# Altium PCB SLEEPTRACK2_PHASE4.PcbDoc
Units mil, origin at the board's own origin, x right, y up, seen from the top; angles counter-clockwise.
Board outline 1320 x 2000 mil, 4 copper layers (Top Layer, GND, VCC, Bottom Layer), stack 30.634 mil thick; 23 components, 18 nets, 92 pads, 50 vias.
Unrouted connection lines stored in the file: 1.
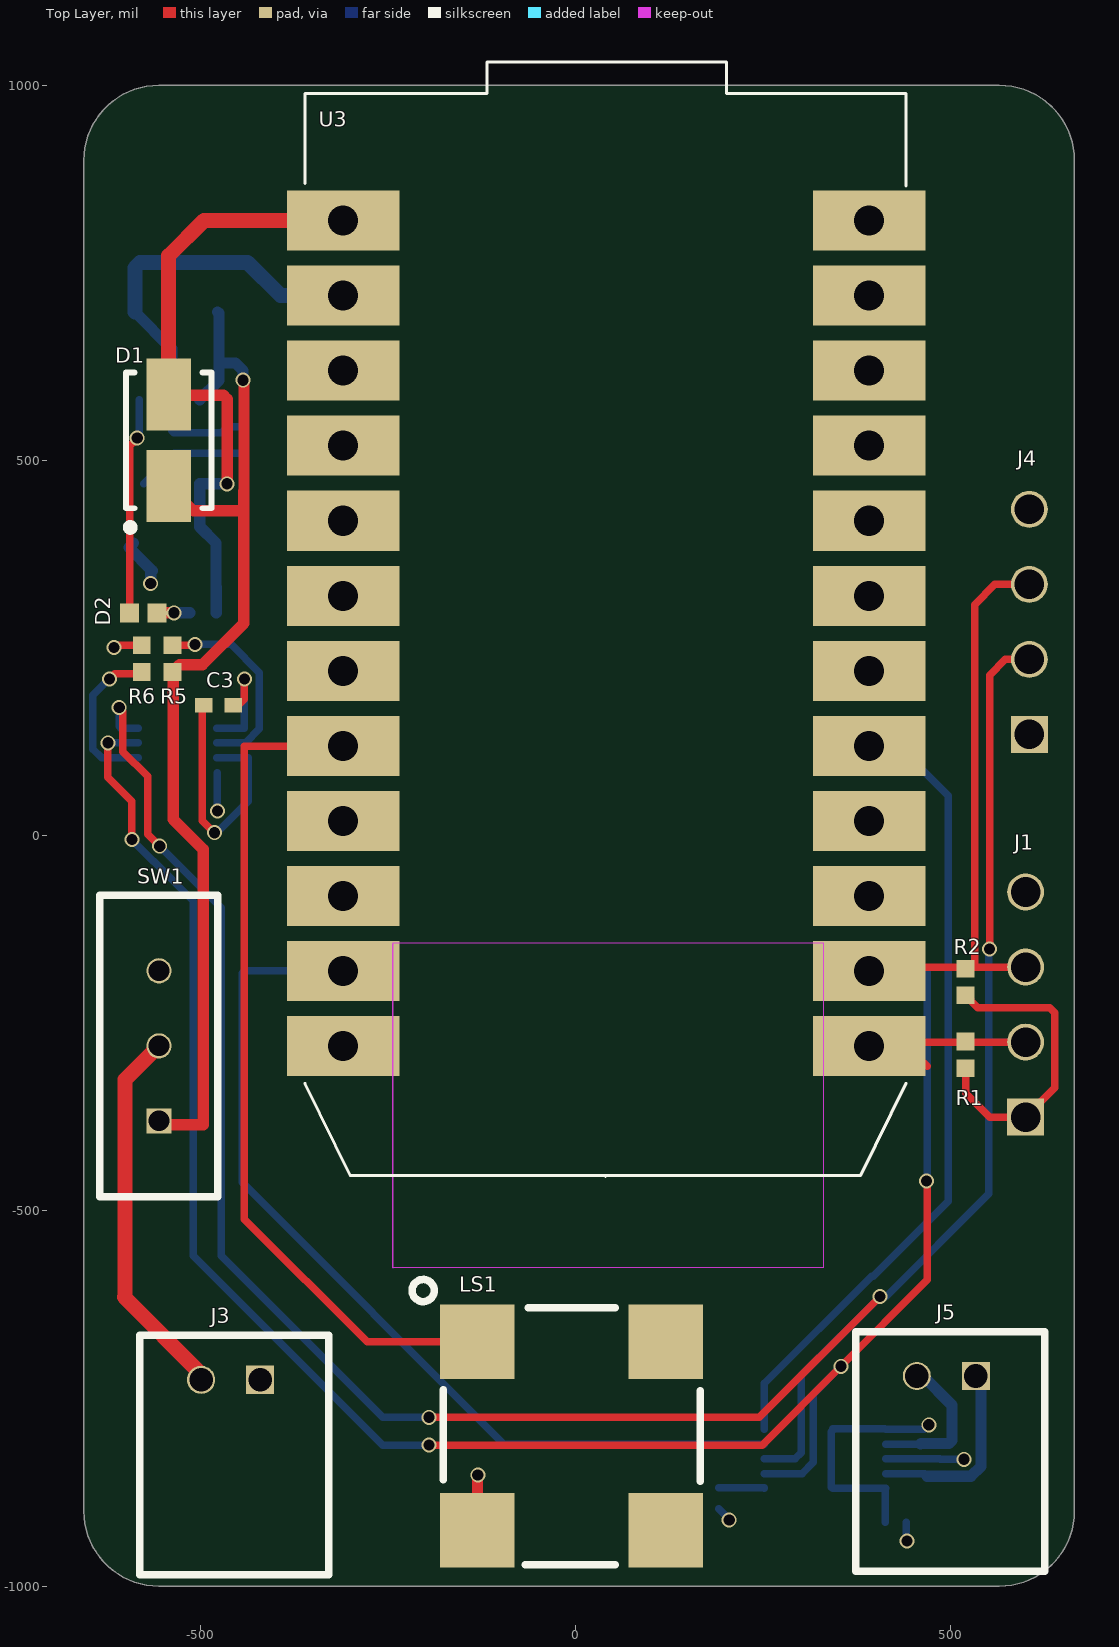
[diagram p0: Top Layer view]
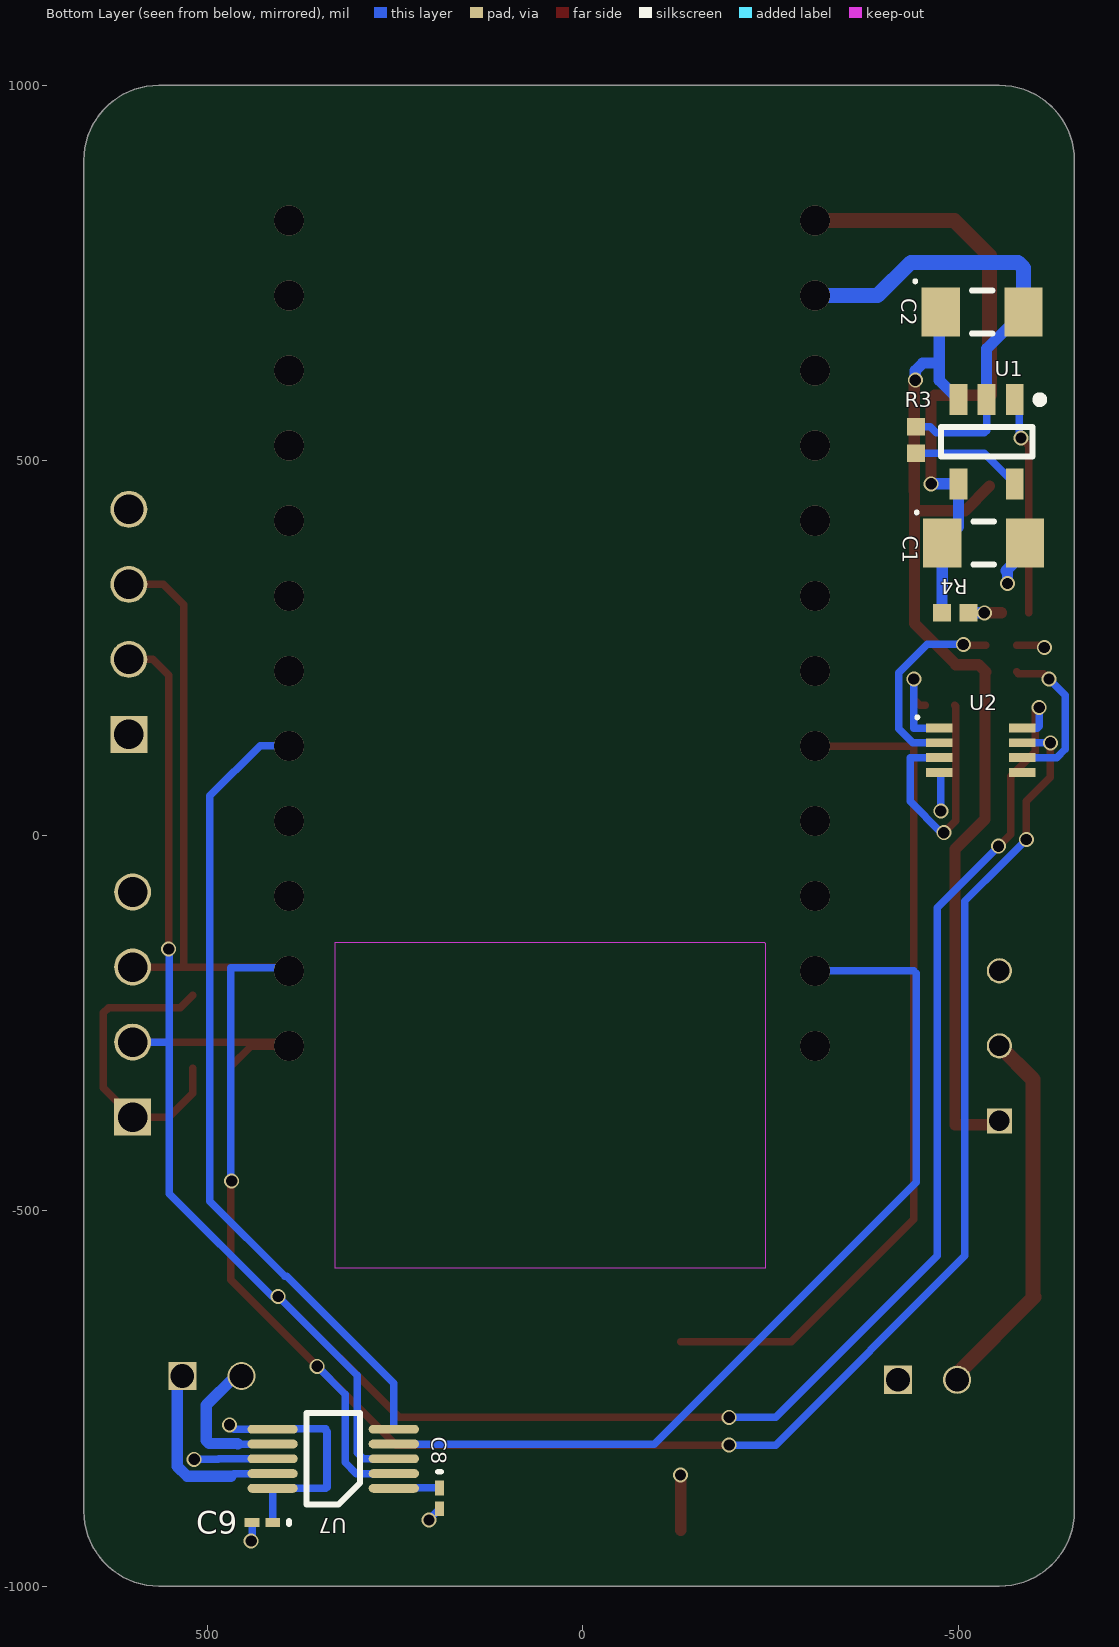
[diagram p1: Bottom Layer view, seen from below]
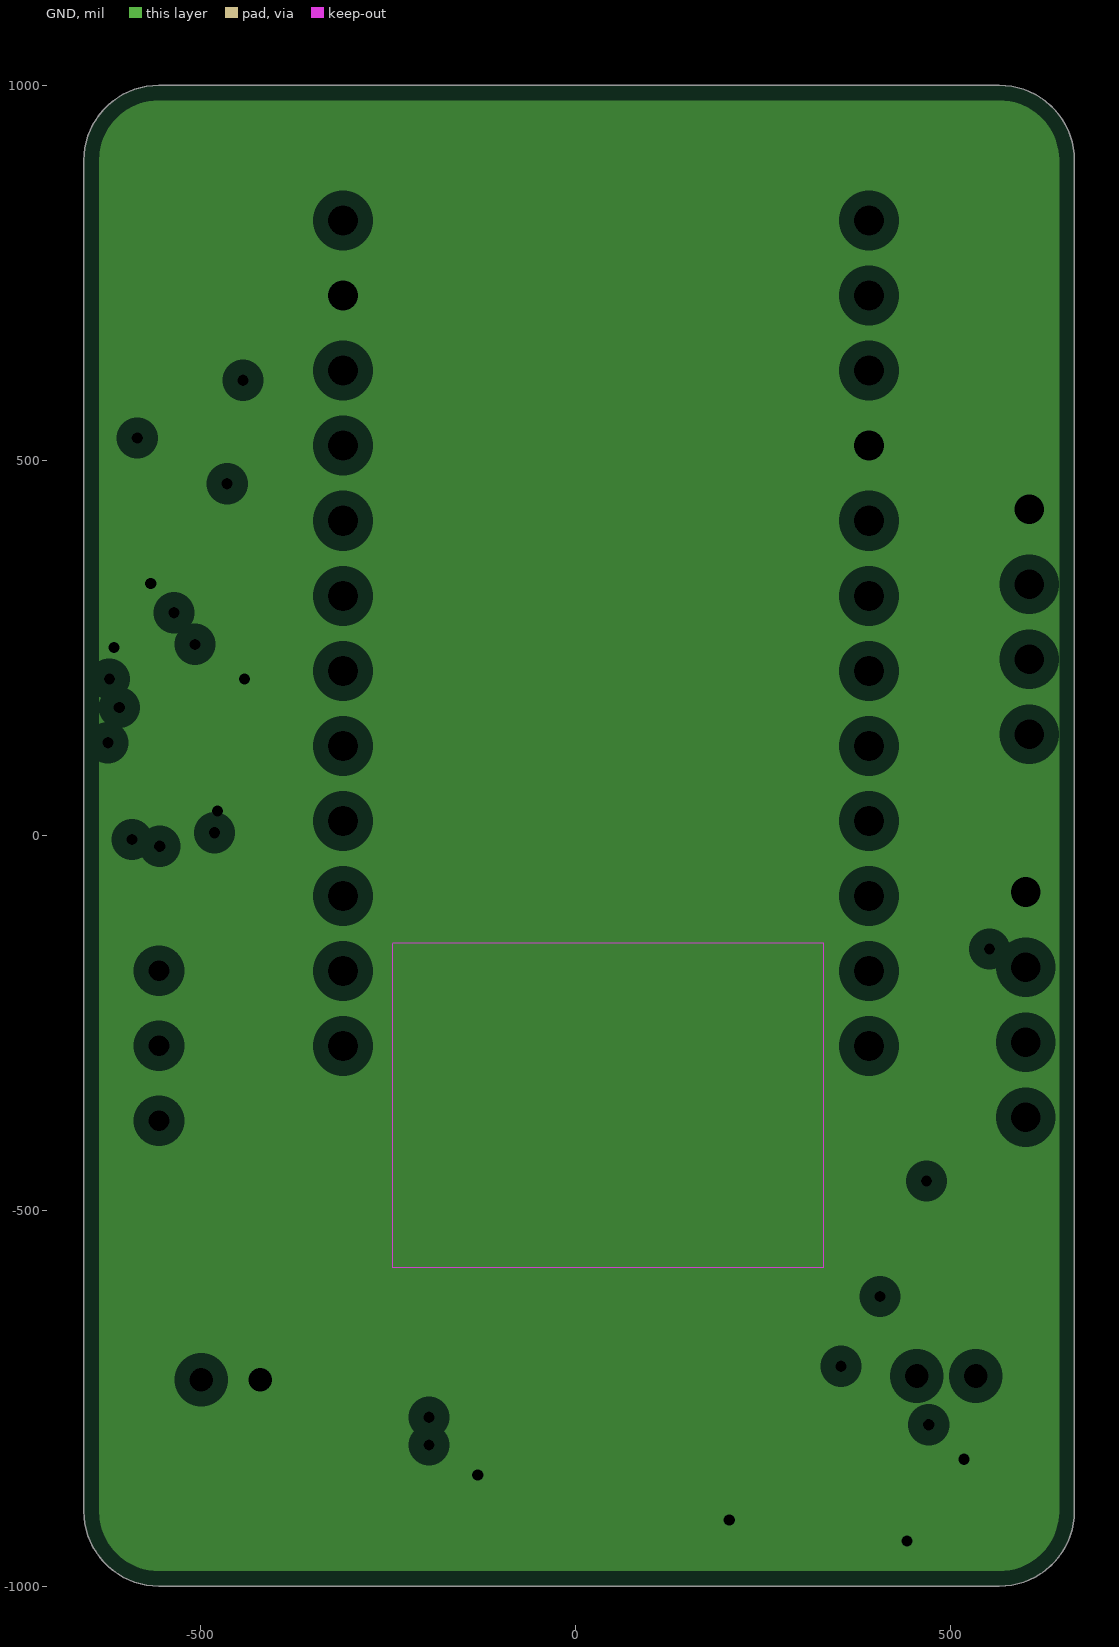
[diagram p2: GND, clearances drawn from the general rule]
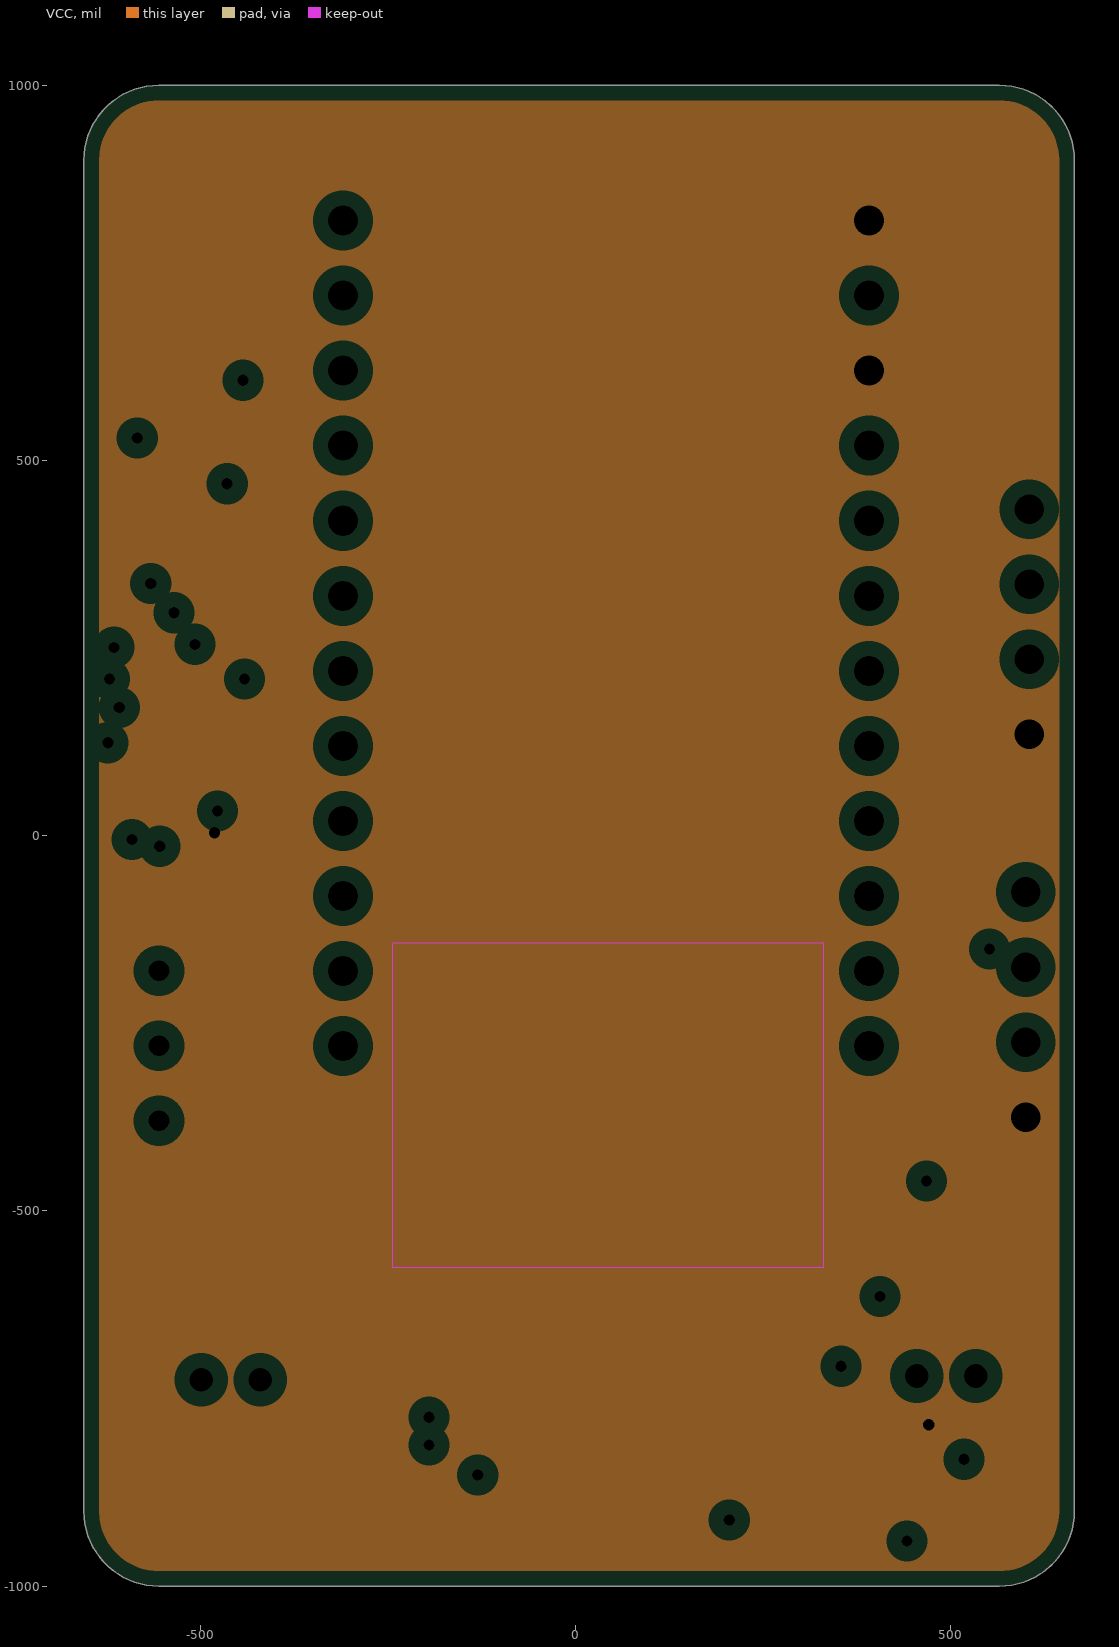
[diagram p3: VCC, clearances drawn from the general rule]

## Layer stack, top to bottom
Top Solder: solder mask 0.4, Solder Resist, Dk 3.5
Top Layer: signal copper 1.4
Dielectric 1: core 10, FR-4, Dk 4.2
GND: plane copper 1.417, net PHOTON_GND
Dielectric 3: prepreg 5, Dk 4.2
VCC: plane copper 1.417, net PHOTON_3V3
Dielectric 2: core 10, Dk 4.2
Bottom Layer: signal copper 1.4
Bottom Solder: solder mask 0.4, Solder Resist, Dk 3.5

## Board outline
-655,-900 -655,900 cw(c-555,900) -555,1000 565,1000 cw(c565,900) 665,900 665,-900 cw(c565,-900) 565,-1000 -555,-1000 cw(c-555,-900)

## Design rules (kind name [scope] priority, off if disabled: settings)
Clearance [All] p1: gap=5
HoleSize [All] p1: absolutevalues=TRUE maxlimit=300 minlimit=1 maxpercent=80.000 minpercent=20.000
MinimumSolderMaskSliver [All] p1: minsoldermaskwidth=3
PlaneClearance [All] p1: clearance=20
PlaneConnect [All] p1: planeconnectstyle=Relief reliefexpansion=20 reliefentries=4 reliefconductorwidth=10 reliefairgap=10
PolygonConnect [All] p1: connectstyle=Relief reliefconductorwidth=10 reliefentries=4 polygonreliefangle="90 Angle" airgapwidth=10
RoomDefinition "P09_DRV2605L Motor Driver" [InComponentClass('P09_DRV2605L Motor Driver')] p1 off: confinementstyle=ConfineIn formatcopy=TRUE lockcomponents=FALSE outline 710,660 1015,660 1015,800 710,800
RoomDefinition "P06_Audio " [InComponentClass('P06_Audio ')] p2 off: confinementstyle=ConfineIn formatcopy=TRUE lockcomponents=FALSE outline 710,100 1115,100 1115,610 710,610
RoomDefinition P04_Connectors [InComponentClass('P04_Connectors')] p3 off: confinementstyle=ConfineIn formatcopy=TRUE lockcomponents=FALSE outline 710,-450 1005,-450 1005,50 710,50
RoomDefinition "P03_Battery Circuit" [InComponentClass('P03_Battery Circuit')] p4 off: confinementstyle=ConfineIn formatcopy=TRUE lockcomponents=FALSE outline 710,-940 2095,-940 2095,-500 710,-500
RoomDefinition P02_Photon [InComponentClass('P02_Photon')] p5 off: confinementstyle=ConfineIn formatcopy=TRUE lockcomponents=FALSE outline -2000,-1660 -1085,-1660 -1085,-1370 -2000,-1370
RoutingVias [All] p1: holewidth=15 width=20 viastyle="Through Hole" minholewidth=10 minwidth=15 maxholewidth=50 maxwidth=50
ShortCircuit [All] p1: allowed=TRUE
SilkToSilkClearance [All] p1: silktosilkclearance=5
SilkToSolderMaskClearance [IsPad] p1: minsilkscreentomaskgap=3 clearancetoexposedcopper=TRUE
SolderMaskExpansion [All] p1: expansion=4
Width [All] p1: maxlimit=50 minlimit=10 preferedwidth=10
23 further rules are at their usual default settings.

## Classes and differential pairs
component class P02_Photon: R1 R2 U3
component class "P03_Battery Circuit": C1 C2 C3 D1 D2 D3 J3 R3 R4 R5 R6 SW1 U1 U2
component class P04_Connectors: J1 J4
component class "P06_Audio ": LS1
component class "P09_DRV2605L Motor Driver": C8 C9 J5 P1 U7

## Components (designator, comment, footprint, x,y, rotation, side; value= is the part's Value field where it differs from the comment)
C1 "4.7µF ±10%" CAPCP1206 -534,390 r180 bottom
C2 "4.7µF ±10%" CAPCP1206 -532,698 r180 bottom
C3 "GRM155R61A105KE15D" 0402 -475.69,174 r0 top
C8 "C1608X7R1C105K" 0603 191,-883 r270 bottom
C9 "C1608X7R1C105K" 0603 427,-915 r0 bottom
D1 "VS-MBRA140TRPBF" D0-214AC -542,527.02 r90 top
D2 "RED LED" LED0402N -575.89,297 r0 top
J1 "HEADER 4/SM" 61900411021 600,-375 r90 top
J3 "S2B-PH-K-S" S2B-PH-K-S -420,-725 r180 top
J4 "HEADER 4/SM" 61900411021 605,135 r90 top
J5 "S2B-PH-K-S" S2B-PH-K-S 533.74,-720 r180 top
LS1 "SDR08540M3-01" SDR08540M3-01 -5,-800 r90 top
R1 "10k" RESC402N 520,-292 r90 top
R2 "10k" RESC402N 520,-195 r90 top
R3 "2k" RESC402N -444,527.28 r90 bottom
R4 "330R" RESC402N -496.28,297 r180 bottom
R5 "1k" RESC402N -537,236 r270 top
R6 "1k" RESC402N -578,236 r90 top
SW1 "100mA, 30V" SS12DH2 -555,-280 r90 top
U1 "MCP73831" SOT95P270X145-5N -538,525 r270 bottom
U2 "MAX17044" SON50P300X100_HS-9M -530,114 r180 bottom
U3 "photon_headerless" "PHOTON P0 - DUPLICATE" 40,306 r0 top
U7 "DRV2650L" DGS0010A_N 332.71,-830.31 r0 bottom

## Footprints (in the part's own frame and the unit in brackets; to place one, negate y for a bottom-side part, rotate by r counter-clockwise, add the part's x,y. Pads: shape width x height; smd on the part's side, far side on the other; paste and mask are expansions set on the pad)
0402 [mm] "Chip Capacitor, Body 1.0x0.5mm, IPC High Density"
  rect 0.6x0.5 smd: 1(-0.5,0) 2(0.5,0)
  body extent -0.55,-0.3 0.55,0.3, height 1.3
0603 [mm] "Chip Inductor, Body 0.6x0.3mm, IPC High Density"
  rect 0.5x0.3 smd: 1(-0.35,0) 2(0.35,0)
  silkscreen extent -0.9,-0.05 -0.9,0.05, body extent -0.33,-0.18 0.33,0.18, height 0.55
61900411021 [mm] "4 Positions Header Connector 0.100\" (2.54mm) Through Hole, Right Angle Tin"
  rect 1.25x1.25 hole 1: 1(0,0)
  round 1.25 hole 1: 2(2.54,0) 3(5.08,0) 4(7.62,0)
  body extent -1.23,-13.12 8.93,0.4, height 5.9
CAPCP1206 [mm] "Chip Capacitor, 2-Leads, Body 3.20x1.50mm, IPC Medium Density"
  rect 1.3x1.65 smd: 1(-1.4,0) 2(1.4,0)
  silkscreen extent -2.31,-0.72 0.35,1.09, body extent -1.7,-0.8 1.7,0.8, height 1.8
D0-214AC [mm] "Molded Diode, 2-Leads, Body 4.29x2.69mm, IPC Medium Density"
  rect 2.45x1.5 smd: 1(-1.55,0) 2(1.55,0)
  silkscreen extent -3.07,-1.45 2.3,1.45, body extent -2.52,-1.45 2.52,1.45, height 2.44
DGS0010A_N [mm] "TSSOP, 10-Leads, Body 3x3mm, Pitch 0.5mm, IPC Medium Density"
  oval 1.7x0.3 smd mask+0.025: 1(-2.05,1) 2(-2.05,0.5) 3(-2.05,0) 4(-2.05,-0.5) 5(-2.05,-1) 6(2.05,-1) 7(2.05,-0.5) 8(2.05,0) 9(2.05,0.5) 10(2.05,1)
  silkscreen extent -0.9,-1.55 0.9,1.55, body extent -2.45,-1.5 2.45,1.5, height 0.94
LED0402N [mm] "Chip LED, 2-Leads, Body 1.00x0.50mm, IPC Medium Density"
  rect 0.64x0.64 smd: 1(-0.46,0) 2(0.46,0)
  body extent -0.5,-0.25 0.5,0.25, height 0.49
"PHOTON P0 - DUPLICATE" [mil]
  rect 150x80 smd: 1(-349.39,513.76) 2(-349.39,413.76) 3(-349.39,313.76) 4(-349.39,213.76) 5(-349.39,113.76) 6(-349.39,13.76) 7(-349.39,-86.24) 8(-349.39,-186.24) 9(-349.39,-286.24) 10(-349.39,-386.24) 11(-349.39,-486.24) 12(-349.41,-586.22) 13(351.39,-586.22) 14(351.38,-486.22) 15(351.38,-386.22) 16(351.38,-286.24) 17(351.38,-186.24) 18(351.38,-86.24) 19(351.38,13.76) 20(351.38,113.76) 21(351.38,213.76) 22(351.38,313.76) 23(351.38,413.76) 24(351.38,513.76)
  Multi-Layer keep-out region: -283.46,-449.8 -282.48,-448.82 290.35,-448.82 290.35,-881.89 -283.46,-881.89
  silkscreen extent -401,-760 401,725, body extent -400,-758 402,725, height 443
RESC402N [mm] "Chip Resistor, 2-Leads, Body 1.00x0.50mm, IPC Medium Density"
  rect 0.6x0.6 smd: 1(-0.45,0) 2(0.45,0)
  body extent -0.55,-0.3 0.55,0.3, height 0.4
S2B-PH-K-S [mm] "2 Positions Header, Shrouded Connector 0.079\" (2.00mm) Through Hole, Right Angle Tin"
  rect 0.95x0.95 hole 0.8: 1(0,0)
  round 0.95 hole 0.8: 2(2,0)
  silkscreen extent -2.32,-1.5 4.08,6.6, body extent -1.95,-1.33 3.95,6.28, height 5.05
SDR08540M3-01 [mm] "Speakers & Transducers 88dB 85mA 3volts 2670Hz"
  rect 2.52x2.52 smd: 1(3.19,3.19) 2(-3.19,3.19) 3(-3.19,-3.19) 4(3.19,-3.19)
  silkscreen extent -4.35,-4.35 5.3,5.4, body extent -4.22,-4.22 4.28,4.27, height 4
SON50P300X100_HS-9M [mm] "SON, 8-Leads, Body 2.00x3.00mm, Pitch 0.50mm, Thermal Pad 1.63x1.06mm, IPC Low Density"
  rect 0.9x0.3 smd: 1(-1.405,0.75) 2(-1.405,0.25) 3(-1.405,-0.25) 4(-1.405,-0.75) 5(1.405,-0.75) 6(1.405,-0.25) 7(1.405,0.25) 8(1.405,0.75)
  silkscreen extent -2.19,1.06 -2.09,1.16, body extent -1.51,-1.01 1.51,1.01, height 1
SOT95P270X145-5N [mm] "SOT23, 5-Leads, Body 2.90x2.70mm, Pitch 0.95mm, IPC Medium Density"
  rect 1.05x0.6 smd: 1(-1.425,0.95) 2(-1.425,0) 3(-1.425,-0.95) 4(1.425,-0.95) 5(1.425,0.95)
  silkscreen extent -1.55,-1.55 0.5,1.92, body extent -1.7,-1.55 1.7,1.55, height 1.45
SS12DH2 [mm] "Slide Switch SPDT Through Hole, Right Angle"
  rect 0.85x0.85 hole 0.7: 1(-2.54,0)
  round 0.85 hole 0.7: 2(0,0) 3(2.54,0)
  silkscreen extent -5.1,-2 5.1,2, body extent -5.11,-2 5.11,4.48, height 5.1

## Part data
C1 C2: library part "4.7µF ±10% Molded Tantalum Capacitors 6.3V 1206 (3216 Metric) 6 Ohm", "T491A475K006AT"
C3: "CAP, CERM, 1 µF, 10 V, +/- 10%, X5R, 0402"
C8 C9: "CAP, CERM, 1 µF, 16 V, +/- 10%, X7R, 0603"
D1: "Diode Schottky 40V 1A Surface Mount SMA"
D2: library part VLMS1500-GS08, "Red 631nm LED Indication - Discrete 2V 0402 (1005 Metric)"
J1 J4: "61900411021"
J3 J5: "2 Positions Header, Shrouded Connector 0.079\" (2.00mm) Through Hole, Right Angle Tin"
LS1: "Speakers & Transducers 88dB 85mA 3volts 2670Hz"
R1 R2: library part RC0402FR-0710KL, "RES SMD 10K OHM 1% 1/16W 0402"
R3: library part RC0402FR-072KL, "RES SMD 2K OHM 1% 1/16W 0402"
R4: library part RC0402FR-07330RL, "RES SMD 330R OHM 1% 1/16W 0402"
R5 R6: library part RC0402FR-071KL, "RES SMD 1K OHM 1% 1/16W 0402"
SW1: library part SS12SDH2, "Slide Switch SPDT Through Hole, Right Angle"
U1: "Charger IC Lithium-Ion/Polymer SOT-23-5"
U2: "Battery Battery Monitor IC Lithium-Ion/Polymer 8-TDFN (2x3)"

## Via types
v1: diameter 20, hole 15, Top Layer to Bottom Layer, tented both sides, 26 vias
v2: diameter 40/40 (per signal layer), hole 40, Top Layer to Bottom Layer, 12 vias
v3: diameter 40, hole 40, Top Layer to Bottom Layer, 12 vias

## Nets (pads, with @x,y where several pads share a name; then routed paths per layer and width w, separated by ;. In a path a pad name is that pad's centre, name@x,y a point inside that pad or via, vN(x,y) a via of type N, cw(c..) or ccw(c..) an arc to the next point about the centre after c; other vN are vias at no path point)
A4: LS1.1 U3.8 | length 1140
  Top Layer w10: v3(-309.39,119.76) -310.15,119 -441,119 -441,-511 -277.59,-674.41 LS1.1
D0: J1.2 J4.2 R1.2 U2.8 U3.13 U7.3 | length 3480
  Top Layer w10: v1(-608,171) -603,166 -603,112 -570,79 -570,2 v1(-554,-14) ; v1(-195,-775) 245,-775 v1(406,-614) ; 469,-307 442.22,-280.22 v2(391.39,-280.22) 396.61,-275 J1.2 ; v1(552,-151) 552,214 573,235 J4.2
  Bottom Layer w10: v1(-608,171) -608,146 -605.53,143.53 U2.8 U2.8@-582.36,143.53 ; v1(-554,-14) -472,-96 -472,-560 -257,-775 v1(-195,-775) ; U7.3 292.69,-830.31 301,-822 301,-719 v1(406,-614) 414,-614 551,-477 551,-275 ; v1(552,-151) 551,-152 551,-275 ; J1.2 551,-275
D1: J1.3 J4.3 R2.2 U2.7 U3.14 U7.2 | length 3435.1
  Top Layer w10: v1(-623,123.84) -623,78 -591,46 v1(-591,-5) ; v1(-195,-812) 249,-812 v1(354,-707) 469,-592 v1@469,-459 ; v2(391.38,-180.22) 396.6,-175 R2.2@531,-175 ; J1.3 R2.2@531,-175 ; J4.3 559,335 532,308 532,-174 R2.2@531,-175
  Bottom Layer w10: v1(-623,123.84) U2.7 U2.7@-582.36,123.84 ; v1(-591,-5) -591,-5.28 -562.28,-34 -562,-34 -509,-87 -509,-560 -257,-812 v1(-195,-812) ; U7.2 302,-850 317,-835 317,-744 v1(354,-707) ; v2(391.38,-180.22) 395.6,-176 469,-176 469,-459 v1(468,-460)
NetC8_1: C8.1 U7.1 | length 61.2
  Bottom Layer w10: C8.1 251.54,-869.22 U7.1
NetD2_1: D2.1 U1.1 | length 289.3
  Top Layer w10: D2.1 -594,520 v1(-584,530)
  Bottom Layer w10: v1(-584,530) -581.53,532.47 U1.1@-581.53,581.1
NetD2_2: D2.2 R4.2 | length 43.8
  Top Layer w15: D2.2 v1(-535,297)
  Bottom Layer w15: v1(-535,297) R4.2
NetJ3_2: J3.2 SW1.3 | length 506.4
  Top Layer w20: -555,-280 -600,-325 -600,-614 -601,-615 -498.74,-717.26 J3.2
NetJ5_1: J5.1 U7.9 | length 257.1
  Bottom Layer w10: U7.9 465.5,-850 469,-853.5
  Bottom Layer w15: 469,-853.5 527.32,-853.5 540.5,-840.32 540.5,-726.76 J5.1
NetJ5_2: J5.2 U7.7 | length 200.7
  Bottom Layer w10: U7.7 460,-810.63
  Bottom Layer w15: J5.2 463,-720 502,-759 502,-806 498,-810 460.63,-810 460,-810.63
NetR3_1: R3.1 U1.5 | length 148.2
  Bottom Layer w10: U1.5 -534.73,509.57 R3.1
NetR5_1: R5.1 U2.2 | length 271.4
  Top Layer w10: R5.1 -508.28,253.72 v1(-507,255)
  Bottom Layer w10: v1(-507,255) -458.72,255 -421,217.28 -421,142.31 -439.47,123.84 U2.2 U2.2@-477.64,123.84
NetR6_1: R6.1 U2.6 | length 215
  Top Layer w10: v1(-621,209) -614,216 -580.28,216 R6.1
  Bottom Layer w10: v1(-621,209) -643,187 -643,115.56 -631.28,103.84 -582.68,103.84 U2.6@-582.36,104.16
PHOTON_3V3: C3.1 C9.1 J1.1 J4.1 R1.1 R2.1 U2.3 U3.22 U3.24 U7.6 U7.10 | length 1078.2
  Top Layer w10: C3.1 -497,172.37 -497,20 v1(-481,4) ; R1.1 520,-343 552,-375 J1.1 639,-336 639,-236 632,-229 536.28,-229 R2.1
  Bottom Layer w10: v1(-481,4) -477.72,4 -436,45.72 -436,104.16 U2.3 U2.3@-477.64,104.16 ; C9.1 413.22,-869.88 U7.10 342.68,-869.68 341,-868 341,-794 343,-792 343,-790 412.47,-790 U7.6 465.06,-790.94 v1(471,-785)
  other v2: 391.38,619.76 391.38,819.76
PHOTON_A1: U3.11 U7.4 | length 1255.2
  Bottom Layer w10: v3(-309.39,-180.24) -441.24,-180.24 -444,-183 -444,-462 -95.37,-810.63 U7.4
PHOTON_D4: U3.17 U7.5 | length 1080.2
  Bottom Layer w10: U7.5 252,-729.72 394.72,-587 397,-587 497,-487 497,53 430,120 391.62,120 v2(391.38,119.76)
PHOTON_GND: C1.2 C2.2 C3.2 C8.2 C9.2 J1.4 J3.1 J4.4 LS1.2 R3.2 R6.2 U1.2 U2.1 U2.4 U3.2 U3.21 U7.8 | length 1166.6
  Top Layer w10: v1(-615,251) -612.28,253.72 R6.2 ; C3.2 -449,174 -441,182 v1(-441,209)
  Top Layer w15: LS1.2 -130.59,-852.59 v1(-130,-852)
  Bottom Layer w10: U1.2 -538,540 -535,537 -471,537 -463,545 R3.2 ; U2.1@-477.64,143.53 U2.1 -441,143.53 v1(-441,209) ; v1(-477,33) U2.4@-477,84 ; C8.2 205,-910.78 v1(205,-912) ; U7.8 485.31,-830.31 486,-831 v1(518,-831) ; C9.2 440.78,-938.78 v1(442,-940)
  Bottom Layer w15: C1.2 -595,384.12 -564,353.12 -566,351.12 v1(-566,336) ; C2.2 -538,648.88 U1.2
  Bottom Layer w20: C2.2 -587.12,756.88 -580,764 -437,764 -392.78,719.78 v3(-309.41,719.78)
  other v2: 391.38,519.76
PHOTON_VIN: C1.1 D1.2 R4.1 U1.4 U3.1 | length 848.9
  Top Layer w15: D1.2 -540.95,587 -469,587 -464,582 -464,469 v1(-464.1,468.9)
  Top Layer w20: D1.2 -542,773 -495,820 -494,819 -493.24,819.76 v3(-309.41,819.78)
  Bottom Layer w15: R4.1 -478.57,331.57 -478.88,331.88 C1.1 -500.6,411.72 U1.4 v1(-464.1,468.9)
VBAT: C2.1 D1.1 R5.2 SW1.1 U1.3 | length 1418.6
  Top Layer w15: SW1.1 -550,-385 -496,-385 -496,-18 -536,22 R5.2@-536,218.28 ; D1.1 -509,433 -442,433 ; R5.2 -527.28,228 -497,228 -442,283 -442,433 ; v1(-443,607) -441.6,605.6 -441.6,459.58 -442,459.18 -442,433
  Bottom Layer w15: U1.3 -475,606.7 -475,630 ; C2.1 -475,696.12 -475,630 ; v1(-443,607) -443,620 -453,630 -475,630
pads on no net: LS1.3 LS1.4 SW1.2 U2.5 U3.3 U3.4 U3.5 U3.6 U3.7 U3.9 U3.10 U3.12 U3.15 U3.16 U3.18 U3.19 U3.20 U3.23
copper on no net:
  other v2: 391.38,-80.22 391.38,19.76 391.38,219.76 391.38,319.76 391.38,419.76 391.38,719.76
  other v3: -309.41,-280.22 -309.39,-80.24 -309.39,19.76 -309.39,219.76 -309.39,319.76 -309.39,419.76 -309.39,519.76 -309.39,619.76

## Polygon pours and split planes (outlines as drawn)
PHOTON_GND on GND (split plane): 572.84,979.61 580.61,978.46 588.22,976.55 595.61,973.91 602.71,970.55 609.44,966.51 615.75,961.84 621.57,956.57 626.84,950.75 631.51,944.44 635.55,937.71 638.91,930.61 641.55,923.22 643.46,915.61 644.61,907.84 644.97,900.63 644.9,900 644.9,-900 644.97,-900.63 644.61,-907.84 643.46,-915.61 641.55,-923.22 638.91,-930.61 635.55,-937.71 631.51,-944.44 626.84,-950.75 621.57,-956.57 615.75,-961.84 609.44,-966.51 602.71,-970.55 595.61,-973.91 588.22,-976.55 580.61,-978.46 572.84,-979.61 565.63,-979.97 565,-979.9 -555,-979.9 -555.63,-979.97 -562.84,-979.61 -570.61,-978.46 -578.22,-976.55 -585.61,-973.91 -592.71,-970.55 -599.44,-966.51 -605.75,-961.84 -611.57,-956.57 -616.84,-950.75 -621.51,-944.44 -625.55,-937.71 -628.91,-930.61 -631.55,-923.22 -633.46,-915.61 -634.61,-907.84 -634.97,-900.63 -634.9,-900 -634.9,900 -634.97,900.63 -634.61,907.84 -633.46,915.61 -631.55,923.22 -628.91,930.61 -625.55,937.71 -621.51,944.44 -616.84,950.75 -611.57,956.57 -605.75,961.84 -599.44,966.51 -592.71,970.55 -585.61,973.91 -578.22,976.55 -570.61,978.46 -562.84,979.61 -555.63,979.97 -555,979.9 565,979.9 565.63,979.97
PHOTON_3V3 on VCC (split plane): 572.84,979.61 580.61,978.46 588.22,976.55 595.61,973.91 602.71,970.55 609.44,966.51 615.75,961.84 621.57,956.57 626.84,950.75 631.51,944.44 635.55,937.71 638.91,930.61 641.55,923.22 643.46,915.61 644.61,907.84 644.97,900.63 644.9,900 644.9,-900 644.97,-900.63 644.61,-907.84 643.46,-915.61 641.55,-923.22 638.91,-930.61 635.55,-937.71 631.51,-944.44 626.84,-950.75 621.57,-956.57 615.75,-961.84 609.44,-966.51 602.71,-970.55 595.61,-973.91 588.22,-976.55 580.61,-978.46 572.84,-979.61 565.63,-979.97 565,-979.9 -555,-979.9 -555.63,-979.97 -562.84,-979.61 -570.61,-978.46 -578.22,-976.55 -585.61,-973.91 -592.71,-970.55 -599.44,-966.51 -605.75,-961.84 -611.57,-956.57 -616.84,-950.75 -621.51,-944.44 -625.55,-937.71 -628.91,-930.61 -631.55,-923.22 -633.46,-915.61 -634.61,-907.84 -634.97,-900.63 -634.9,-900 -634.9,900 -634.97,900.63 -634.61,907.84 -633.46,915.61 -631.55,923.22 -628.91,930.61 -625.55,937.71 -621.51,944.44 -616.84,950.75 -611.57,956.57 -605.75,961.84 -599.44,966.51 -592.71,970.55 -585.61,973.91 -578.22,976.55 -570.61,978.46 -562.84,979.61 -555.63,979.97 -555,979.9 565,979.9 565.63,979.97

## Keep-outs
Top Layer:
  region: 330.35,-142.82 330.35,-575.89 -243.46,-575.89 -242.97,-575.4 -242.97,-143.31 -242.48,-142.82

## Silkscreen, mask and mechanical layers (free items; w line width, h text height)
Mechanical 1:
  circle w0.25: c-1365.5,-635 r0.12
  lines w0.5: -655,-900 ccw(c-555,-900) -555,-1000 565,-1000 ccw(c565,-900) 665,-900 665,900 ccw(c565,900) 565,1000 -555,1000 ccw(c-555,900) -655,900 -655,-900